# Altium PCB PCB_18_R2.PcbDoc (part 1 of 3)
Units mm, origin at the board's own origin, x right, y up, seen from the top; angles counter-clockwise.
Board outline 255 x 215.3 mm, 2 copper layers (Top Layer, Bottom Layer), stack 1.071 mm thick; 236 components, 0 nets, 1421 pads, 588 vias.
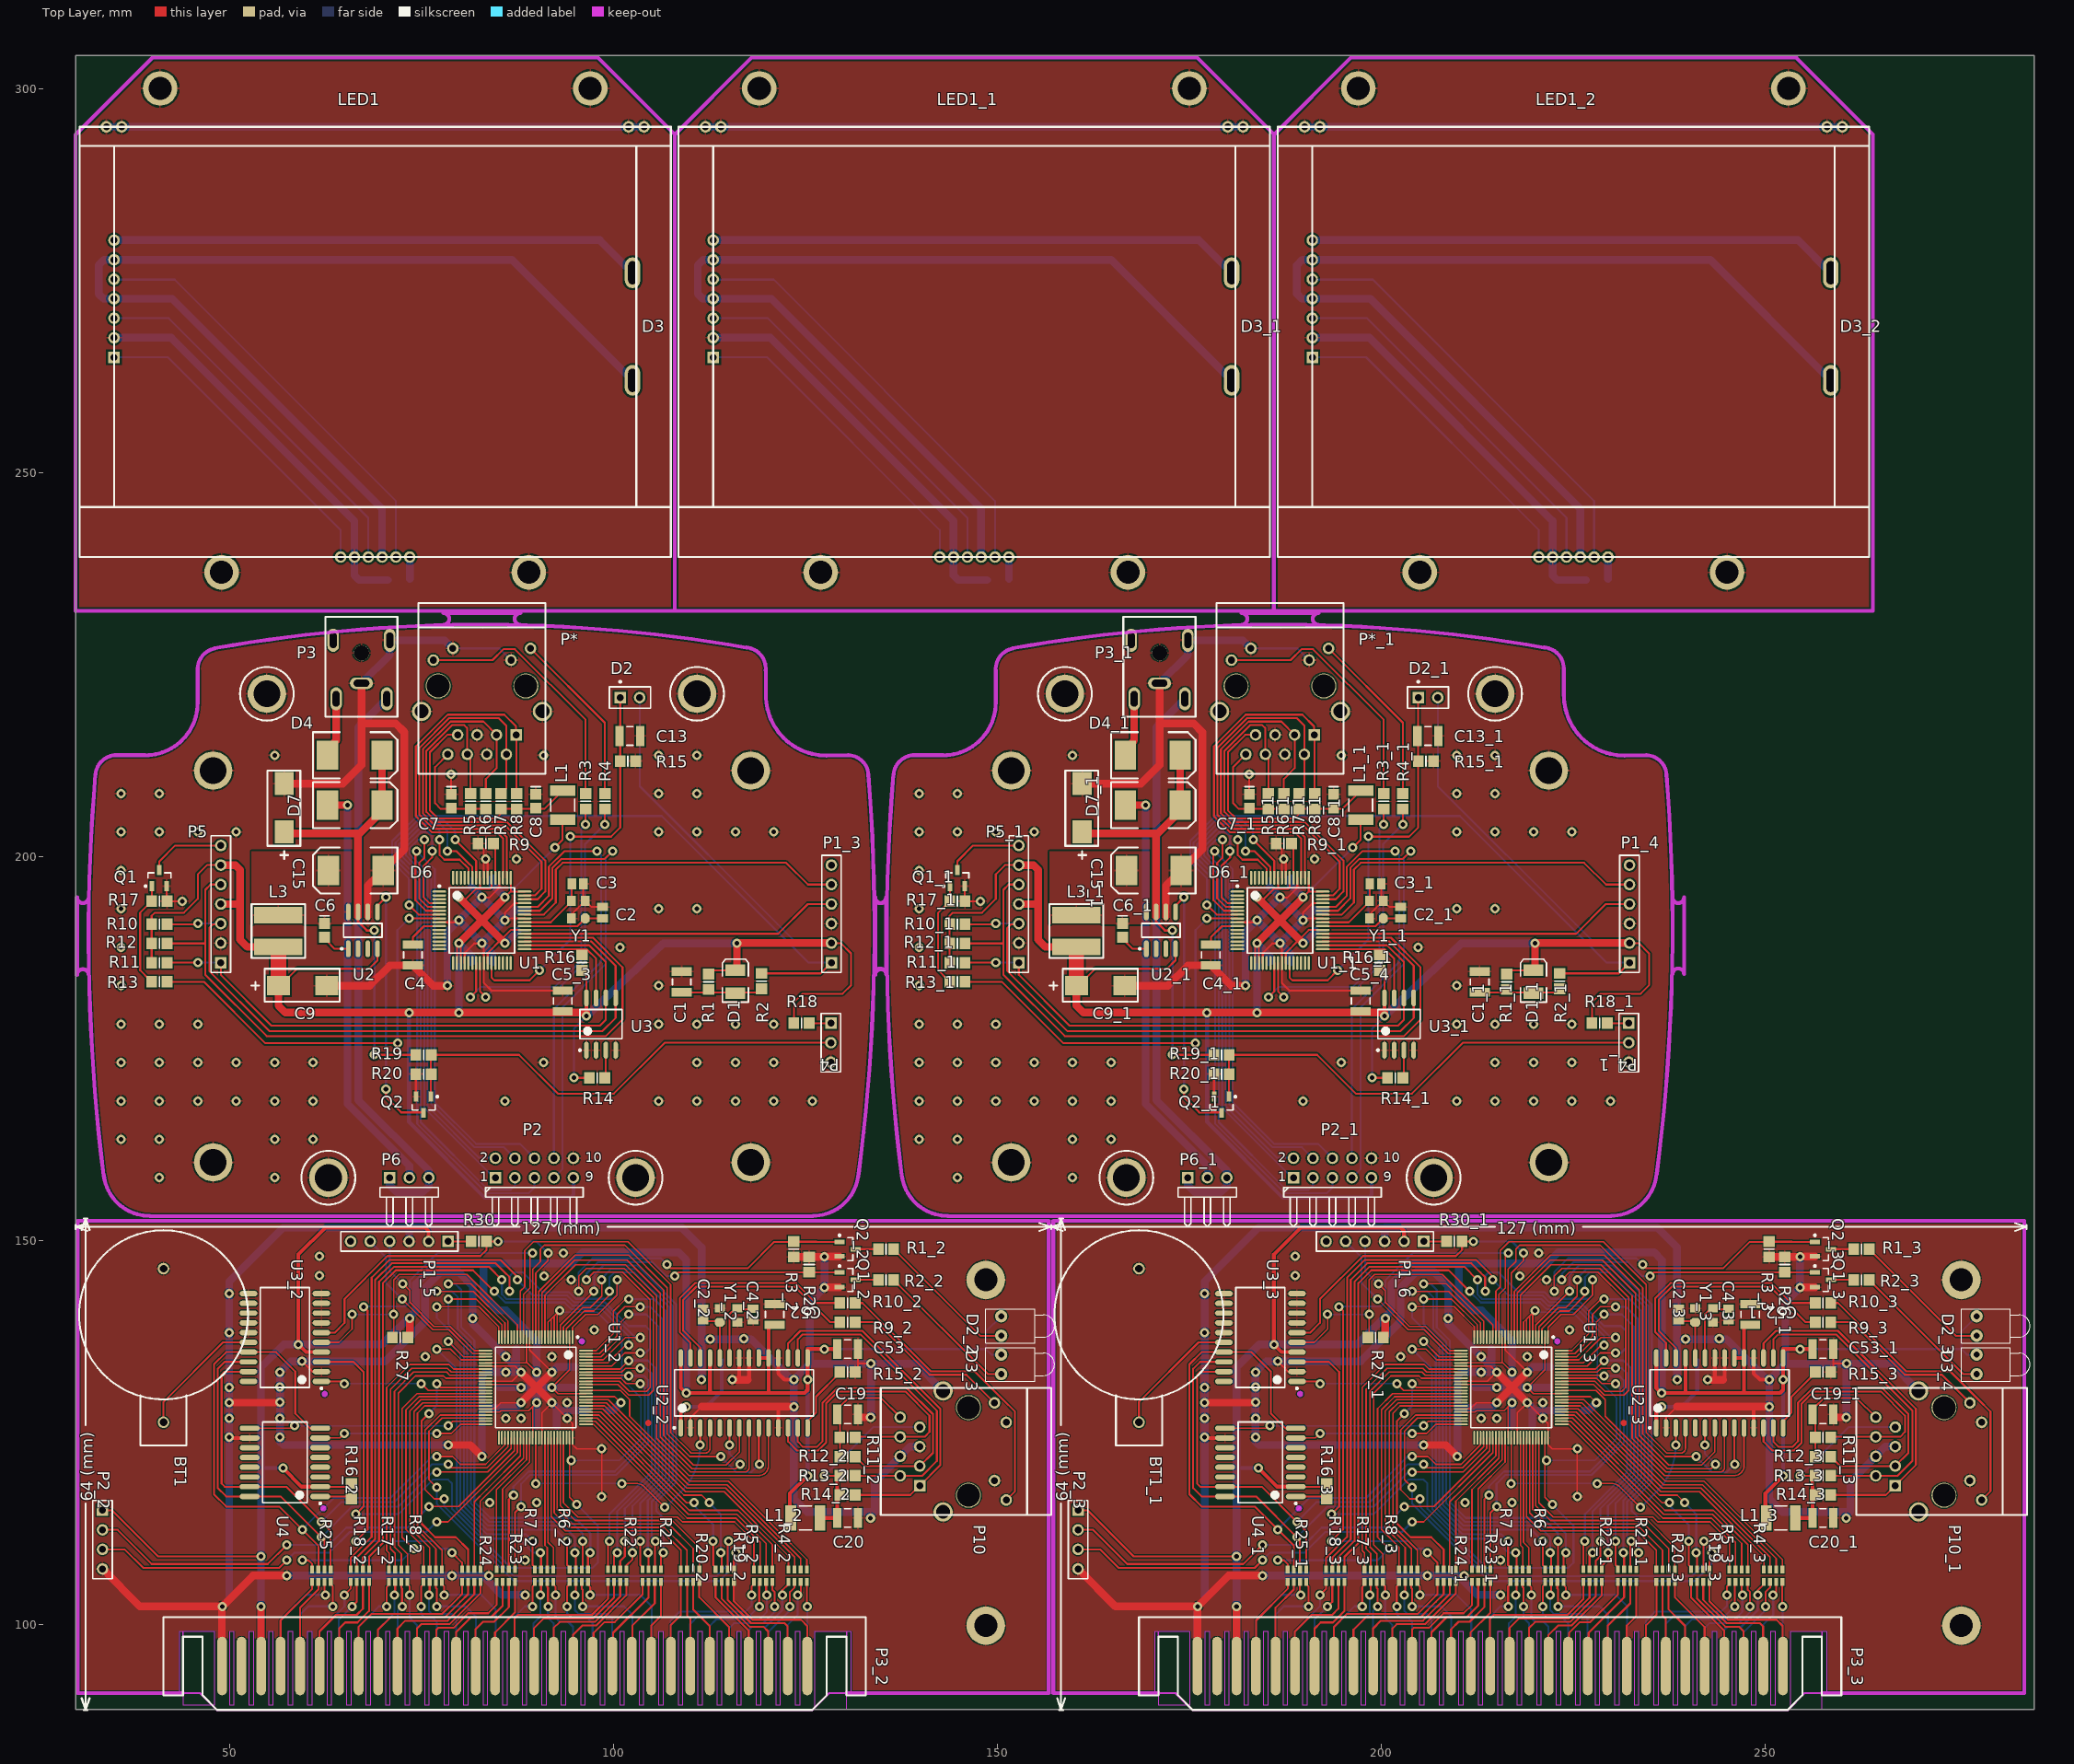
[diagram p0: Top Layer view]
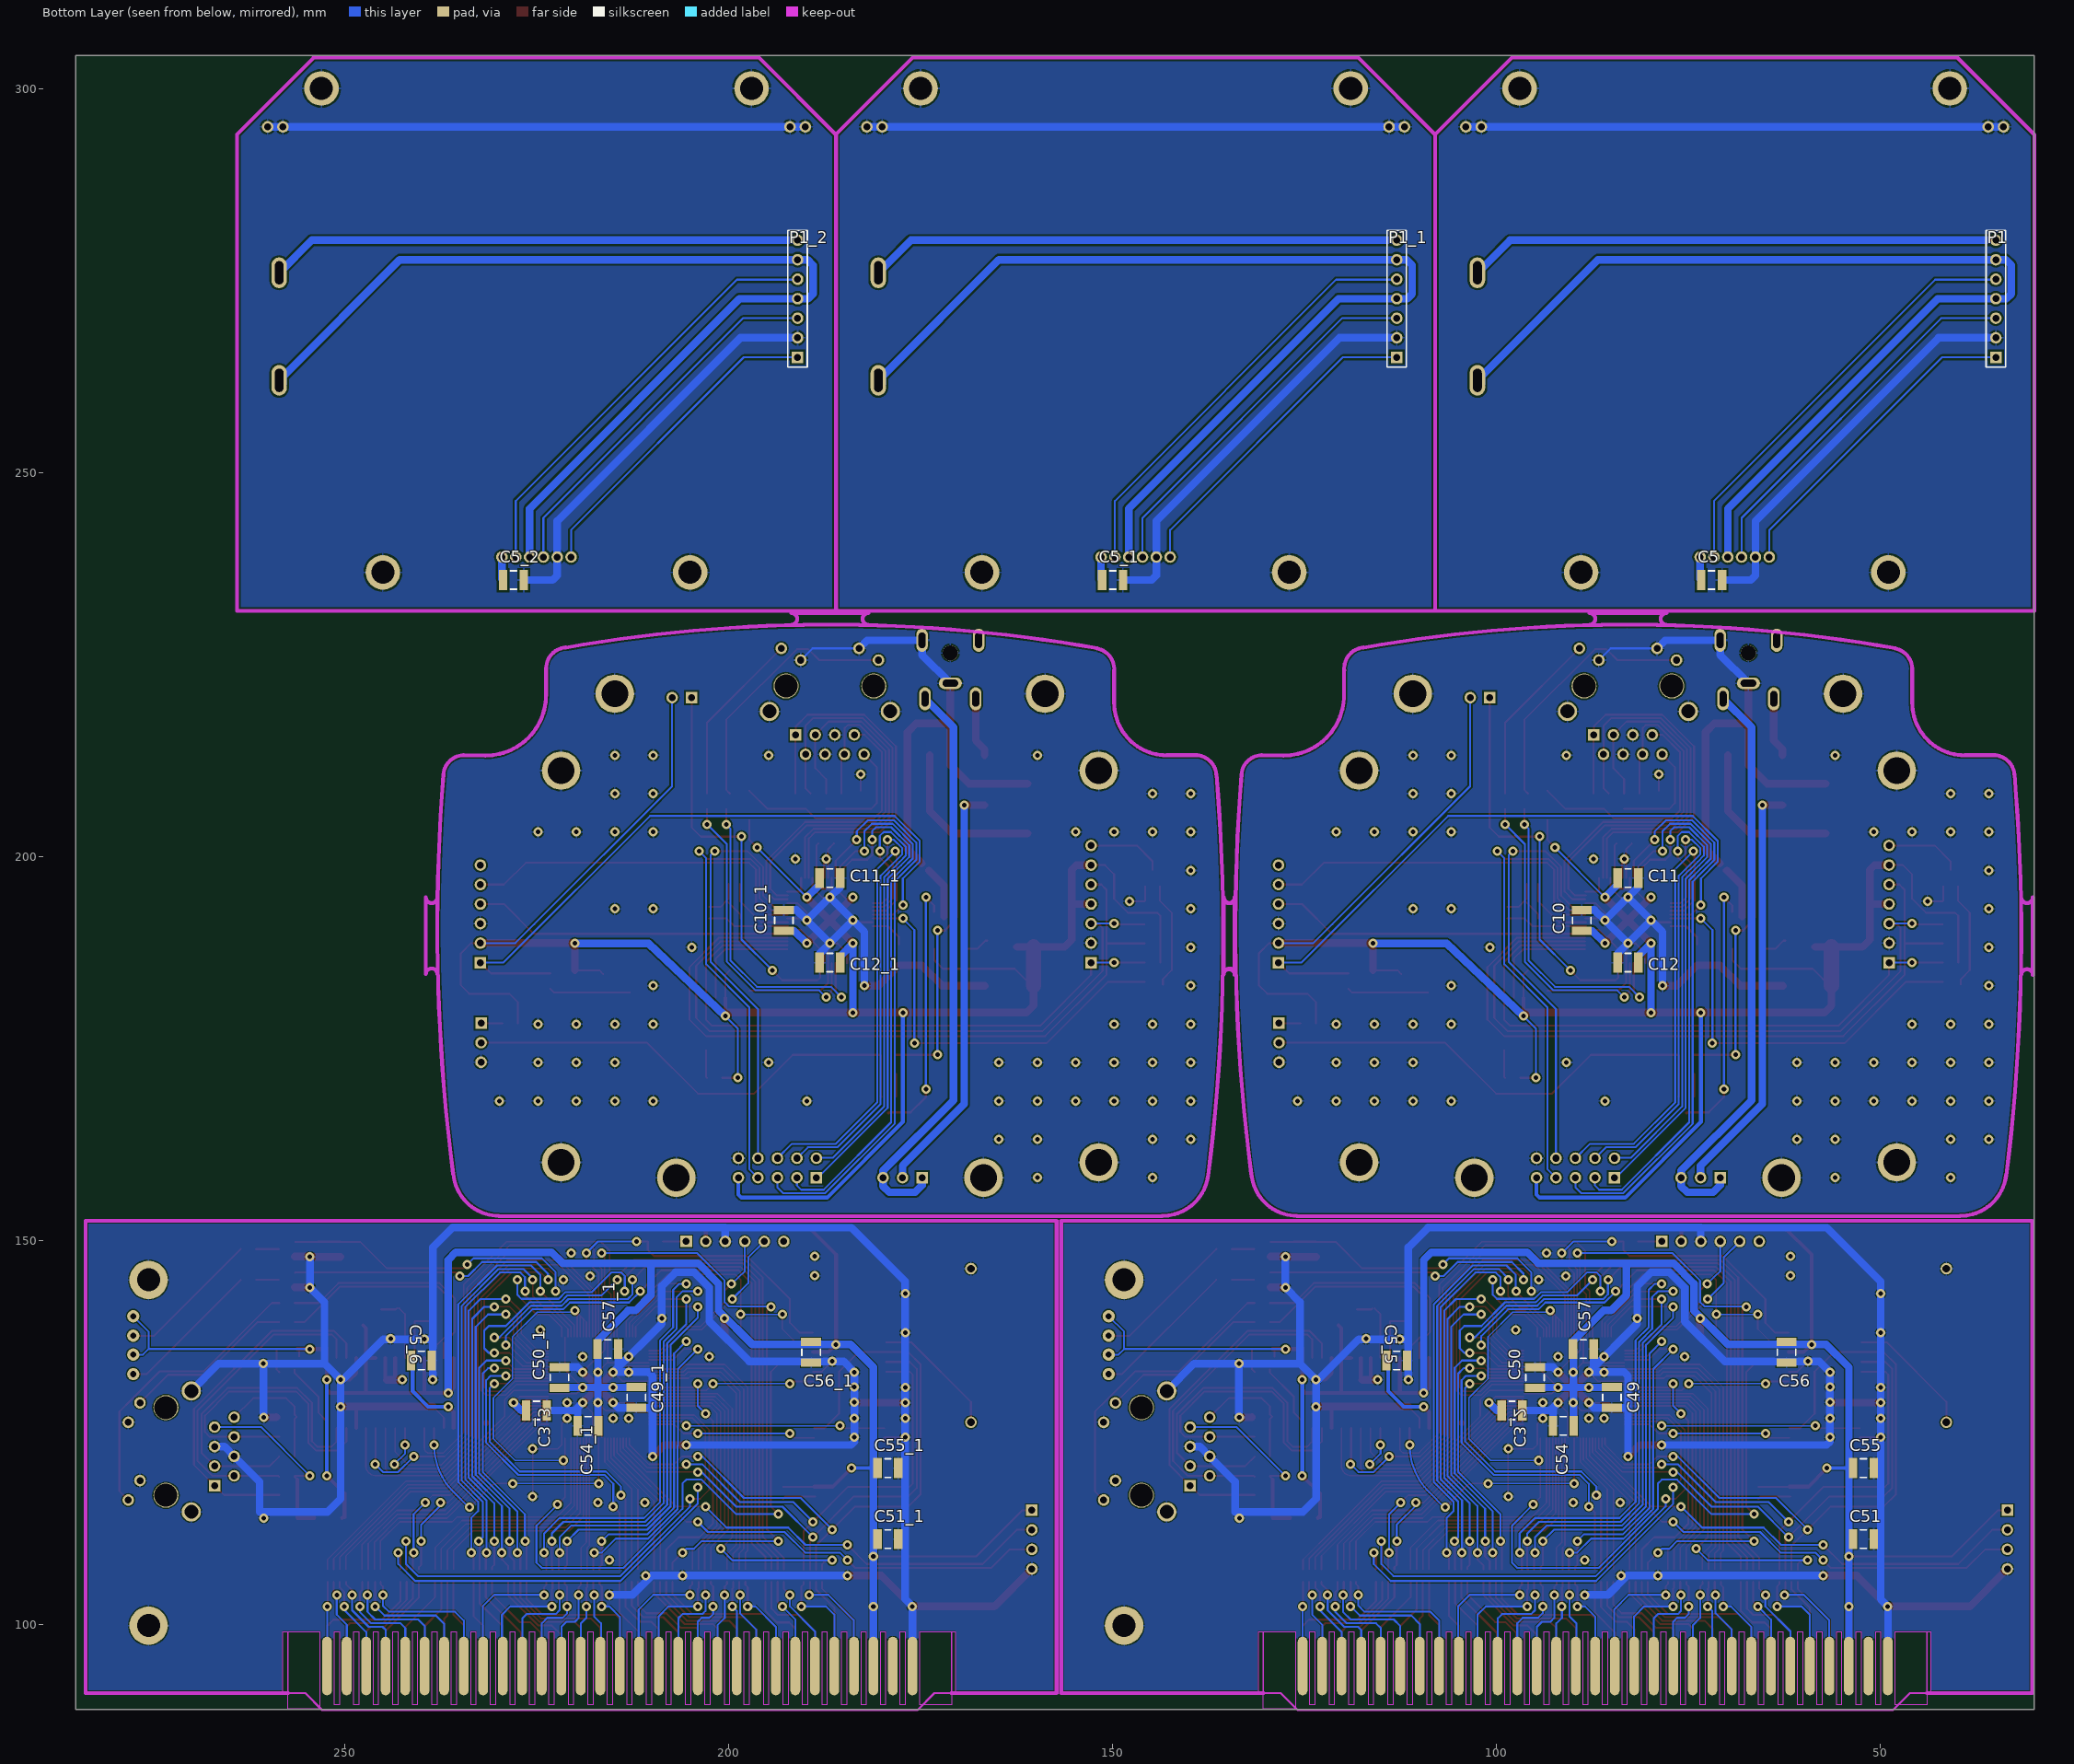
[diagram p1: Bottom Layer view, seen from below]

## Layer stack, top to bottom
Top Layer: signal copper 0.0356
Dielectric: core 1, FR-4, Dk 4.8
Bottom Layer: signal copper 0.0356

## Board outline
30,89 285,89 285,304.3 30,304.3

## Design rules (kind name [scope] priority, off if disabled: settings)
Clearance [All] p1: gap=0.254
PolygonConnect [All] p1: connectstyle=Relief reliefconductorwidth=0.254 reliefentries=4 polygonreliefangle="90 Angle"
RoutingVias [All] p1: holewidth=0.711 width=1.27 viastyle="Through Hole" minholewidth=0.711 minwidth=1.27 maxholewidth=0.711 maxwidth=1.27
SilkscreenOverComponentPads [All] p1: minsilkscreentomaskgap=0.254
SolderMaskExpansion [All] p1: expansion=0.102
Width [All] p1: maxlimit=0.254 minlimit=0.254 preferedwidth=0.254
27 further rules are at their usual default settings.

## Components (designator, comment, footprint, x,y, rotation, side; value= is the part's Value field where it differs from the comment)
BT1 "Battery" "BATTERY PAD" 41.44,140.36 r270 top locked
BT1_1 "Battery" "BATTERY PAD" 168.44,140.36 r270 top locked (schematic designator BT1)
C1 "Cap" CAPC3225L 108.9,183.7 r270 top
C1_1 "Cap" CAPC3225L 212.8,183.7 r270 top (schematic designator C1)
C2 "Cap" CAPC2012L 98.6,192.7 r90 top
C2_1 "Cap" CAPC2012L 202.5,192.7 r90 top (schematic designator C2)
C2_2 "Cap" CAPC2012L 111.7,140.4 r90 top (schematic designator C2)
C2_3 "Cap" CAPC2012L 238.7,140.4 r90 top (schematic designator C2)
C3 "Cap" CAPC2012L 95.35,196.45 r180 top
C3_1 "Cap" CAPC2012L 199.25,196.45 r180 top (schematic designator C3)
C3_2 "Cap" CAPC3225L 98,127.9 r0 bottom locked (schematic designator C3)
C3_3 "Cap" CAPC3225L 225,127.9 r0 bottom locked (schematic designator C3)
C4 "Cap" CAPC3225L 73.9,187.2 r270 top
C4_1 "Cap" CAPC3225L 177.8,187.2 r270 top (schematic designator C4)
C4_2 "Cap" CAPC2012L 118.2,140.4 r90 top (schematic designator C4)
C4_3 "Cap" CAPC2012L 245.2,140.4 r90 top (schematic designator C4)
C5 "Cap" CAPC3225L 72,236 r180 bottom
C5_1 "Cap" CAPC3225L 150,236 r180 bottom (schematic designator C5)
C5_2 "Cap" CAPC3225L 228,236 r180 bottom (schematic designator C5)
C5_3 "Cap" CAPC3225L 93.4,181.2 r90 top (schematic designator C5)
C5_4 "Cap" CAPC3225L 197.3,181.2 r90 top (schematic designator C5)
C5_5 "Cap" CAPC3225L 113,134.4 r180 bottom (schematic designator C5)
C5_6 "Cap" CAPC3225L 240,134.4 r180 bottom (schematic designator C5)
C6 "Cap" CAPC2512L 62.4,190.4 r270 top
C6_1 "Cap" CAPC2512L 166.3,190.4 r270 top (schematic designator C6)
C7 "Cap" CAPC2512L 78.9,207.2 r270 top
C7_1 "Cap" CAPC2512L 182.8,207.2 r270 top (schematic designator C7)
C8 "Cap" CAPC2512L 89.9,207.2 r270 top
C8_1 "Cap" CAPC2512L 193.8,207.2 r270 top (schematic designator C8)
C9 "Cap Pol1" "Type D" 55.9,183.2 r0 top
C9_1 "Cap Pol1" "Type D" 159.8,183.2 r0 top (schematic designator C9)
C10 "Cap" CAPC3225L 88.9,191.7 r90 bottom
C10_1 "Cap" CAPC3225L 192.8,191.7 r90 bottom (schematic designator C10)
C11 "Cap" CAPC3225L 82.9,197.2 r180 bottom
C11_1 "Cap" CAPC3225L 186.8,197.2 r180 bottom (schematic designator C11)
C12 "Cap" CAPC3225L 82.9,186.2 r0 bottom
C12_1 "Cap" CAPC3225L 186.8,186.2 r0 bottom (schematic designator C12)
C13 "Cap" CAPC3225L 102.15,215.7 r0 top
C13_1 "Cap" CAPC3225L 206.05,215.7 r0 top (schematic designator C13)
C15 "Cap Pol1" "Type E" 57.15,202.7 r90 top
C15_1 "Cap Pol1" "Type E" 161.05,202.7 r90 top (schematic designator C15)
C19 "Cap" CAPC3225L 130.5,127.4 r180 top
C19_1 "Cap" CAPC3225L 257.5,127.4 r180 top (schematic designator C19)
C20 "Cap" CAPC3225L 130.5,113.9 r180 top
C20_1 "Cap" CAPC3225L 257.5,113.9 r180 top (schematic designator C20)
C49 "Cap" CAPC3225L 85,129.6 r270 bottom
C49_1 "Cap" CAPC3225L 212,129.6 r270 bottom (schematic designator C49)
C50 "Cap" CAPC3225L 95,132.2 r90 bottom
C50_1 "Cap" CAPC3225L 222,132.2 r90 bottom (schematic designator C50)
C51 "Cap" CAPC3225L 52.25,111.15 r180 bottom
C51_1 "Cap" CAPC3225L 179.25,111.15 r180 bottom (schematic designator C51)
C52 "Cap" CAPC3225L 121,140.4 r90 top
C52_1 "Cap" CAPC3225L 248,140.4 r90 top (schematic designator C52)
C53 "Cap" CAPC3225L 130.5,135.9 r0 top
C53_1 "Cap" CAPC3225L 257.5,135.9 r0 top (schematic designator C53)
C54 "Cap" CAPC3225L 91.3,125.9 r0 bottom
C54_1 "Cap" CAPC3225L 218.3,125.9 r0 bottom (schematic designator C54)
C55 "Cap" CAPC3225L 52.25,120.4 r180 bottom
C55_1 "Cap" CAPC3225L 179.25,120.4 r180 bottom (schematic designator C55)
C56 "Cap" CAPC3225L 62.25,135.495 r270 bottom
C56_1 "Cap" CAPC3225L 189.25,135.495 r270 bottom (schematic designator C56)
C57 "Cap" CAPC3225L 88.7,135.9 r180 bottom
C57_1 "Cap" CAPC3225L 215.7,135.9 r180 bottom (schematic designator C57)
D1 "Diode" DSO-C2/D5.6 115.9,183.7 r90 top
D1_1 "Diode" DSO-C2/D5.6 219.8,183.7 r90 top (schematic designator D1)
D2 "Photo Sen" PIN2 100.9,220.7 r0 top
D2_1 "Photo Sen" PIN2 204.8,220.7 r0 top (schematic designator D2)
D2_2 "LED1" LED-1 150.5,138.9 r0 top (schematic designator D2)
D2_3 "LED1" LED-1 277.5,138.9 r0 top (schematic designator D2)
D3 "TB1065S" TB1065S 103,245.5 r180 top
D3_1 "TB1065S" TB1065S 181,245.5 r180 top (schematic designator D3)
D3_2 "TB1065S" TB1065S 259,245.5 r180 top (schematic designator D3)
D3_3 "LED1" LED-1 150.5,133.9 r0 top (schematic designator D3)
D3_4 "LED1" LED-1 277.5,133.9 r0 top (schematic designator D3)
D4 "Diode" "SMC WBODY" 69.9,213.2 r180 top
D4_1 "Diode" "SMC WBODY" 173.8,213.2 r180 top (schematic designator D4)
D6 "30BQ100" "SMC WBODY" 62.9,198.2 r0 top
D6_1 "30BQ100" "SMC WBODY" 166.8,198.2 r0 top (schematic designator D6)
D7 "Diode" "SMC WBODY" 69.9,206.7 r180 top
D7_1 "Diode" "SMC WBODY" 173.8,206.7 r180 top (schematic designator D7)
L1 "Inductor" INDC4532L 93.4,206.7 r90 top
L1_1 "Inductor" INDC4532L 197.3,206.7 r90 top (schematic designator L1)
L1_2 "Inductor" INDC4532L 125,113.9 r0 top (schematic designator L1)
L1_3 "Inductor" INDC4532L 252,113.9 r0 top (schematic designator L1)
L3 "Inductor" CDRH5D28NP 56.4,192.4 r270 top
L3_1 "Inductor" CDRH5D28NP 160.3,192.4 r270 top (schematic designator L3)
LED1 "TIC218" TIC218 30.5,295 r0 top
LED1_1 "TIC218" TIC218 108.5,295 r0 top (schematic designator LED1)
LED1_2 "TIC218" TIC218 186.5,295 r0 top (schematic designator LED1)
P1 "Header 7" HDR1X7 35,265 r90 bottom
P1_1 "Header 7" HDR1X7 113,265 r90 bottom (schematic designator P1)
P1_2 "Header 7" HDR1X7 191,265 r90 bottom (schematic designator P1)
P1_3 "Программатор" HDR1X6 128.4,186.2 r90 top (schematic designator P1)
P1_4 "Программатор" HDR1X6 232.3,186.2 r90 top (schematic designator P1)
P1_5 "Программатор" HDR1X6 78.5,149.9 r180 top (schematic designator P1)
P1_6 "Программатор" HDR1X6 205.5,149.9 r180 top (schematic designator P1)
P2 "Header 5X2H" HDR2X5H 84.65,158.2 r0 top
P2_1 "Header 5X2H" HDR2X5H 188.55,158.2 r0 top (schematic designator P2)
P2_2 "I2C" HDR1X4 33.5,114.9 r270 top (schematic designator P2)
P2_3 "I2C" HDR1X4 160.5,114.9 r270 top (schematic designator P2)
P3 "PWR coneector" "PWR Con" 70.9,230.7 r270 top
P3_1 "PWR coneector" "PWR Con" 174.8,230.7 r270 top (schematic designator P3)
P3_2 "31x2 Slot" SL-62 49.06,89.56 r0 top (schematic designator P3)
P3_3 "31x2 Slot" SL-62 176.06,89.56 r0 top (schematic designator P3)
P4 "power control" HDR1X3 128.32,178.32 r270 top
P4_1 "power control" HDR1X3 232.22,178.32 r270 top (schematic designator P4)
P5 "Display" HDR1X7 48.9,186.2 r90 top locked
P5_1 "Display" HDR1X7 152.8,186.2 r90 top locked (schematic designator P5)
P6 "Header 3H" HDR1X3H 70.9,158.2 r0 top
P6_1 "Header 3H" HDR1X3H 174.8,158.2 r0 top (schematic designator P6)
P10 "J00-0063NL" ETHERNETCON 146.248,122.568 r0 top
P10_1 "J00-0063NL" ETHERNETCON 273.248,122.568 r0 top (schematic designator P10)
P* "J00-0063NL" EthernetCON 82.9,222.2 r90 top locked
P*_1 "J00-0063NL" EthernetCON 186.8,222.2 r90 top locked (schematic designator P*)
Q1 "BSS123" SOT23_N 40.9,197.2 r90 top
Q1_1 "BSS123" SOT23_N 144.8,197.2 r90 top (schematic designator Q1)
Q1_2 "BSS123" SOT23_N 130.5,144.9 r0 top (schematic designator Q1)
Q1_3 "BSS123" SOT23_N 257.5,144.9 r0 top (schematic designator Q1)
Q2 "BSS123" SOT23_N 75.3,167.7 r270 top
Q2_1 "BSS123" SOT23_N 179.2,167.7 r270 top (schematic designator Q2)
Q2_2 "BSS123" SOT23_N 130.5,148.9 r0 top (schematic designator Q2)
Q2_3 "BSS123" SOT23_N 257.5,148.9 r0 top (schematic designator Q2)
R1 "Res2" RESC2012M 112.4,183.7 r90 top
R1_1 "Res2" RESC2012M 216.3,183.7 r90 top (schematic designator R1)
R1_2 "Res2" RESC2012M 135.5,148.9 r180 top (schematic designator R1)
R1_3 "Res2" RESC2012M 262.5,148.9 r180 top (schematic designator R1)
R2 "Res2" RESC2012M 119.3,183.8 r270 top
R2_1 "Res2" RESC2012M 223.2,183.8 r270 top (schematic designator R2)
R2_2 "Res2" RESC2012M 135.5,144.9 r180 top (schematic designator R2)
R2_3 "Res2" RESC2012M 262.5,144.9 r180 top (schematic designator R2)
R3 "Res2" RESC2012M 96.4,207.2 r90 top
R3_1 "Res2" RESC2012M 200.3,207.2 r90 top (schematic designator R3)
R3_2 "Res2" RESC2012M 123.5,148.9 r270 top (schematic designator R3)
R3_3 "Res2" RESC2012M 250.5,148.9 r270 top (schematic designator R3)
R4 "Res2" RESC2012M 98.9,207.2 r90 top
R4_1 "Res2" RESC2012M 202.8,207.2 r90 top (schematic designator R4)
R4_2 "CAT16" CAT16 124,106.4 r180 top (schematic designator R4)
R4_3 "CAT16" CAT16 251,106.4 r180 top (schematic designator R4)
R5 "Res2" RESC2012M 81.4,207.2 r90 top
R5_1 "Res2" RESC2012M 185.3,207.2 r90 top (schematic designator R5)
R5_2 "CAT16" CAT16 119.5,106.4 r180 top (schematic designator R5)
R5_3 "CAT16" CAT16 246.5,106.4 r180 top (schematic designator R5)
R6 "Res2" RESC2012M 83.4,207.2 r90 top
R6_1 "Res2" RESC2012M 187.3,207.2 r90 top (schematic designator R6)
R6_2 "CAT16" CAT16 95.5,106.4 r180 top (schematic designator R6)
R6_3 "CAT16" CAT16 222.5,106.4 r180 top (schematic designator R6)
R7 "Res2" RESC2012M 85.4,207.2 r90 top
R7_1 "Res2" RESC2012M 189.3,207.2 r90 top (schematic designator R7)
R7_2 "CAT16" CAT16 91,106.4 r180 top (schematic designator R7)
R7_3 "CAT16" CAT16 218,106.4 r180 top (schematic designator R7)
R8 "Res2" RESC2012M 87.4,207.2 r90 top
R8_1 "Res2" RESC2012M 191.3,207.2 r90 top (schematic designator R8)
R8_2 "CAT16" CAT16 76.5,106.4 r180 top (schematic designator R8)
R8_3 "CAT16" CAT16 203.5,106.4 r180 top (schematic designator R8)
R9 "Res2" RESC2012M 83.4,201.7 r0 top
R9_1 "Res2" RESC2012M 187.3,201.7 r0 top (schematic designator R9)
R9_2 "Res2" RESC2012M 130.5,139.4 r0 top (schematic designator R9)
R9_3 "Res2" RESC2012M 257.5,139.4 r0 top (schematic designator R9)
R10 "Res2" RESC2012M 40.9,191.2 r0 top
R10_1 "Res2" RESC2012M 144.8,191.2 r0 top (schematic designator R10)
R10_2 "Res2" RESC2012M 130.5,141.9 r0 top (schematic designator R10)
R10_3 "Res2" RESC2012M 257.5,141.9 r0 top (schematic designator R10)
R11 "Res2" RESC2012M 40.9,186.2 r0 top
R11_1 "Res2" RESC2012M 144.8,186.2 r0 top (schematic designator R11)
R11_2 "Res2" RESC2012M 130.5,124.4 r0 top (schematic designator R11)
R11_3 "Res2" RESC2012M 257.5,124.4 r0 top (schematic designator R11)
R12 "Res2" RESC2012M 40.9,188.7 r180 top
R12_1 "Res2" RESC2012M 144.8,188.7 r180 top (schematic designator R12)
R12_2 "Res2" RESC2012M 130.5,121.9 r0 top (schematic designator R12)
R12_3 "Res2" RESC2012M 257.5,121.9 r0 top (schematic designator R12)
R13 "Res2" RESC2012M 40.9,183.7 r180 top
R13_1 "Res2" RESC2012M 144.8,183.7 r180 top (schematic designator R13)
R13_2 "Res2" RESC2012M 130.5,119.4 r0 top (schematic designator R13)
R13_3 "Res2" RESC2012M 257.5,119.4 r0 top (schematic designator R13)
R14 "Res2" RESC2012M 97.9,171.2 r0 top
R14_1 "Res2" RESC2012M 201.8,171.2 r0 top (schematic designator R14)
R14_2 "Res2" RESC2012M 130.5,116.9 r0 top (schematic designator R14)
R14_3 "Res2" RESC2012M 257.5,116.9 r0 top (schematic designator R14)
R15 "Res2" RESC2012M 101.9,212.45 r180 top
R15_1 "Res2" RESC2012M 205.8,212.45 r180 top (schematic designator R15)
R15_2 "Res2" RESC2012M 130.5,132.9 r180 top (schematic designator R15)
R15_3 "Res2" RESC2012M 257.5,132.9 r180 top (schematic designator R15)
R16 "Res2" RESC2012M 95.9,186.2 r90 top
R16_1 "Res2" RESC2012M 199.8,186.2 r90 top (schematic designator R16)
R16_2 "Res2" RESC2012M 65.9,117.4 r90 top (schematic designator R16)
R16_3 "Res2" RESC2012M 192.9,117.4 r90 top (schematic designator R16)
R17 "Res2" RESC2012M 40.9,194.2 r0 top
R17_1 "Res2" RESC2012M 144.8,194.2 r0 top (schematic designator R17)
R17_2 "CAT16" CAT16 72,106.4 r180 top locked (schematic designator R17)
R17_3 "CAT16" CAT16 199,106.4 r180 top locked (schematic designator R17)
R18 "Res2" RESC2012M 124.51,178.32 r0 top
R18_1 "Res2" RESC2012M 228.41,178.32 r0 top (schematic designator R18)
R18_2 "CAT16" CAT16 67,106.4 r0 top locked (schematic designator R18)
R18_3 "CAT16" CAT16 194,106.4 r0 top locked (schematic designator R18)
R19 "Res2" RESC2012M 75.3,174.2 r0 top
R19_1 "Res2" RESC2012M 179.2,174.2 r0 top (schematic designator R19)
R19_2 "CAT16" CAT16 114.5,106.4 r0 top (schematic designator R19)
R19_3 "CAT16" CAT16 241.5,106.4 r0 top (schematic designator R19)
R20 "Res2" RESC2012M 75.3,171.7 r180 top
R20_1 "Res2" RESC2012M 179.2,171.7 r180 top (schematic designator R20)
R20_2 "CAT16" CAT16 110,106.4 r0 top (schematic designator R20)
R20_3 "CAT16" CAT16 237,106.4 r0 top (schematic designator R20)
R21 "CAT16" CAT16 105,106.4 r0 top
R21_1 "CAT16" CAT16 232,106.4 r0 top (schematic designator R21)
R22 "CAT16" CAT16 100.5,106.4 r0 top
R22_1 "CAT16" CAT16 227.5,106.4 r0 top (schematic designator R22)
R23 "CAT16" CAT16 86,106.4 r0 top
R23_1 "CAT16" CAT16 213,106.4 r0 top (schematic designator R23)
R24 "CAT16" CAT16 81.5,106.4 r0 top
R24_1 "CAT16" CAT16 208.5,106.4 r0 top (schematic designator R24)
R25 "CAT16" CAT16 62,106.4 r180 top
R25_1 "CAT16" CAT16 189,106.4 r180 top (schematic designator R25)
R26 "Res2" RESC2012M 125.5,146.9 r90 top
R26_1 "Res2" RESC2012M 252.5,146.9 r90 top (schematic designator R26)
R27 "Res2" RESC2012M 72.25,137.4 r0 top
R27_1 "Res2" RESC2012M 199.25,137.4 r0 top (schematic designator R27)
R30 "Res2" RESC2012M 82.5,149.9 r0 top
R30_1 "Res2" RESC2012M 209.5,149.9 r0 top (schematic designator R30)
U1 "PIC18F66J60-I/PT" TQFP-PT64_N 82.9,191.7 r0 top locked
U1_1 "PIC18F66J60-I/PT" TQFP-PT64_N 186.8,191.7 r0 top locked (schematic designator U1)
U1_2 "DSPIC33FJ256MC710T-I/PF" TQFP-PT100_N 89.9,130.9 r270 top locked (schematic designator U1)
U1_3 "DSPIC33FJ256MC710T-I/PF" TQFP-PT100_N 216.9,130.9 r270 top locked (schematic designator U1)
U2 "LM2674M-3.3" M08A_N 67.4,190.4 r90 top
U2_1 "LM2674M-3.3" M08A_N 171.3,190.4 r90 top (schematic designator U2)
U2_2 "ENC28J60-I/SO" SOIC-SO28_N 117.038,130.188 r90 top (schematic designator U2)
U2_3 "ENC28J60-I/SO" SOIC-SO28_N 244.038,130.188 r90 top (schematic designator U2)
U3 "24FC1025T-I/SM" SOIJ-SM8_N 98.4,178.2 r90 top
U3_1 "24FC1025T-I/SM" SOIJ-SM8_N 202.3,178.2 r90 top (schematic designator U3)
U3_2 "DS3234" SOIC20_M 57.25,137.4 r180 top locked (schematic designator U3)
U3_3 "DS3234" SOIC20_M 184.25,137.4 r180 top locked (schematic designator U3)
U4 "M25P128" SOIC127P1030-16M 57.25,121.15 r180 top locked
U4_1 "M25P128" SOIC127P1030-16M 184.25,121.15 r180 top locked (schematic designator U4)
Y1 "Кварцевый резонатор" "HC 49SM" 96.35,191.95 r90 top
Y1_1 "Кварцевый резонатор" "HC 49SM" 200.25,191.95 r90 top (schematic designator Y1)
Y1_2 "Кварцевый резонатор" "HC 49SM" 113.863,139.388 r0 top (schematic designator Y1)
Y1_3 "Кварцевый резонатор" "HC 49SM" 240.863,139.388 r0 top (schematic designator Y1)

## Footprints (in the part's own frame and the unit in brackets; to place one, negate y for a bottom-side part, rotate by r counter-clockwise, add the part's x,y. Pads: shape width x height; smd on the part's side, far side on the other; paste and mask are expansions set on the pad)
"BATTERY PAD" [mm]
  round 1.5 hole 1: 1(14,0) 2(-6,0)
  silkscreen extent -11,-11 17,11, body extent -10.91,-10.98 17,10.98, height 6
CAPC2012L [mm] "Chip Capacitor, Body 2.0x1.3mm, IPC High Density"
  rect 1.1x1.4 smd: 1(-0.75,0) 2(0.75,0)
  body extent -1.1,-0.72 1.1,0.72, height 1.4
CAPC2512L [mm] "Chip Capacitor, Body 2.54x1.27mm, IPC High Density"
  rect 1.4x1.4 smd: 1(-0.9,0) 2(0.9,0)
  silkscreen extent -1.9,-0.6 -1.9,0.6, body extent -1.45,-0.82 1.45,0.82, height 1.3
CAPC3225L [mm] "Chip Capacitor, Body 3.2x2.5mm, IPC High Density"
  rect 1.1x2.6 smd: 1(-1.35,0) 2(1.35,0)
  silkscreen extent -0.4,-1.2 0.4,1.2, body extent -1.7,-1.35 1.7,1.35, height 1.5
CAT16 [mm]
  rect 0.5x1 smd: 1(-1.2,-0.8) 2(-0.4,-0.8) 3(0.4,-0.8) 4(1.2,-0.8) 5(1.2,0.825) 6(0.4,0.825) 7(-0.4,0.825) 8(-1.2,0.825)
  body extent -1.75,-0.8 1.75,0.75, height 0.5
CDRH5D28NP [mm] "POWER INDUCTORS <SMD Type: CDRH Series>"
  rect 2.15x6.3 smd: 1(0,0) 2(4.15,0)
  silkscreen extent -1.4,-3.5 5.6,3.5, body extent -0.82,-2.9 4.97,2.91, height 3
DSO-C2/D5.6 [mm] "SM LED; 2 C-Bend Leads; Body 3.5 x 2.8 x 1.9 mm, inc leads (LxWxH typ)"
  rect 1.5x2.6 smd: 1(-1.5,0) 2(1.5,0)
  silkscreen extent -2.65,-1.7 2.95,1.7
ETHERNETCON [mm] "Ethernet connector w/two LEDs"
  rect 1.5x1.5 hole 0.9: 1(-6.35,-4.445)
  round 1.5 hole 0.9: 2(-8.89,-3.175) 3(-6.35,-1.905) 4(-8.89,-0.635) 5(-6.35,0.635) 6(-8.89,1.905) 7(-6.35,3.175) 8(-8.89,4.445) 9(4.902,-6.325) 10(3.378,-3.785) 11(4.902,3.785) 12(3.378,6.325)
  round 2.5 hole 1.8: 13(-3.302,-7.874) 14(-3.302,7.874)
  round 3.25 hole 3 unplated: 15(0,-5.715) 16(0,5.715)
  silkscreen extent -11.43,-8.25 10.79,8.25, body extent -11.43,-8.25 11,8.25, height 13.97
EthernetCON [mm] "Ethernet connector w/two LEDs"
  rect 1.5x1.5 hole 0.9: 1(-6.35,-4.445)
  round 1.5 hole 0.9: 2(-8.89,-3.175) 3(-6.35,-1.905) 4(-8.89,-0.635) 5(-6.35,0.635) 6(-8.89,1.905) 7(-6.35,3.175) 8(-8.89,4.445) 9(4.902,-6.325) 10(3.378,-3.785) 11(4.902,3.785) 12(3.378,6.325)
  round 2.5 hole 1.8: 13(-3.302,-7.874) 14(-3.302,7.874)
  round 3.25 hole 3 unplated: 15(0,-5.715) 16(0,5.715)
  silkscreen extent -11.43,-8.25 10.79,8.25, body extent -11.43,-8.25 11,8.25, height 13.97
"HC 49SM" [mm] "Кварцевый резонатор"
  oct 1.3x1.1 smd: 1(0,0)
  rect 1.3x1.1 smd: 2(2.3,0) 3(2.3,1.8) 4(0,1.8)
  body extent -0.45,-0.38 2.75,2.12, height 1.2
HDR1X3 [mm] "Connector; Header; 3 Position"
  rect 1.5x1.5 hole 0.9: 1(0,0)
  round 1.5 hole 0.9: 2(2.54,0) 3(5.08,0)
  silkscreen extent -1.27,-1.27 6.35,1.27
HDR1X3H [mm] "Connector; Header; 3 Position; Right Angle"
  rect 1.5x1.5 hole 0.9: 1(0,0)
  round 1.5 hole 0.9: 2(2.54,0) 3(5.08,0)
  silkscreen extent -1.27,-6.35 6.35,-1.27
HDR1X4 [mm] "Connector; Header; 4 Position"
  rect 1.5x1.5 hole 0.9: 1(0,0)
  round 1.5 hole 0.9: 2(2.54,0) 3(5.08,0) 4(7.62,0)
  silkscreen extent -1.27,-1.27 8.89,1.27
HDR1X6 [mm] "Connector; Header; 6 Position"
  rect 1.5x1.5 hole 0.9: 1(0,0)
  round 1.5 hole 0.9: 2(2.54,0) 3(5.08,0) 4(7.62,0) 5(10.16,0) 6(12.7,0)
  silkscreen extent -1.27,-1.27 13.97,1.27
HDR1X7 [mm] "Connector; Header; 7 Position"
  rect 1.5x1.5 hole 0.9: 1(0,0)
  round 1.5 hole 0.9: 2(2.54,0) 3(5.08,0) 4(7.62,0) 5(10.16,0) 6(12.7,0) 7(15.24,0)
  silkscreen extent -1.27,-1.27 16.51,1.27
HDR2X5H [mm] "Connector; Header; 5x2 Position; Right Angle"
  rect 1.5x1.5 hole 0.9: 1(0,0)
  round 1.5 hole 0.9: 2(0,2.54) 3(2.54,0) 4(2.54,2.54) 5(5.08,0) 6(5.08,2.54) 7(7.62,0) 8(7.62,2.54) 9(10.16,0) 10(10.16,2.54)
  silkscreen extent -1.27,-6.35 11.43,-1.27
INDC4532L [mm] "Chip Inductor, Body 4.5x3.2mm, IPC High Density"
  rect 1.4x3.3 smd: 1(-1.9,0) 2(1.9,0)
  silkscreen extent -0.8,-1.55 0.8,1.55, body extent -2.4,-1.7 2.4,1.7, height 0.55
LED-1 [mm] "Typical RED GaAs LED; 2 Leads"
  round 1.6 hole 0.8: 1(0,1.27) 2(0,-1.27)
  silkscreen extent -2,-2.2 6.95,2.2
M08A_N [mm] "SOIC, 8-Leads, Body 4.9x3.9mm, Pitch 1.27mm, IPC Medium Density"
  oval 2.2x0.6 smd: 1(-2.4,1.905) 2(-2.4,0.635) 3(-2.4,-0.635) 4(-2.4,-1.905) 5(2.4,-1.905) 6(2.4,-0.635) 7(2.4,0.635) 8(2.4,1.905)
  silkscreen extent -2.52,-2.5 0.9,2.88, body extent -2,-2.5 2,2.5, height 1.75
PIN2 [mm] "Photosensitive Diode; 2 Leads"
  rect 1.5x1.5 hole 0.9: 1(0,0)
  round 1.5 hole 0.9: 2(2.54,0)
  silkscreen extent -1.4,-1.4 3.94,2.17
"PWR Con" [mm] "Connector"
  oval 1.5x3 hole 0.9 slot 2 at 90 deg: 1(8.128,-3.683)
  oval 3x1.5 hole 0.9 slot 2 at 0 deg: 2(10.16,-0.381) 3(10.16,-6.985) 4_1(2.54,-7.366) 5(2.54,0)
  round 2 hole 2: 4(4.191,-3.683)
  silkscreen extent -0.5,-8.4 12.5,1, body extent 0,-7.37 12,0, height 10
RESC2012M [mm] "Chip Resistor, Body 2.0x1.2mm, IPC Low Density"
  rect 1.4x1.5 smd: 1(-1,0) 2(1,0)
  silkscreen extent 0,-0.65 0,0.65, body extent -1.07,-0.7 1.07,0.7, height 0.7
SL-62 [mm]
  oval 1.27x7.62 smd: 1(0,5.08) 2(2.54,5.08) 3(5.08,5.08) 4(7.62,5.08) 5(10.16,5.08) 6(12.7,5.08) 7(15.24,5.08) 8(17.78,5.08) 9(20.32,5.08) 10(22.86,5.08) 11(25.4,5.08) 12(27.94,5.08) 13(30.48,5.08) 14(33.02,5.08) 15(35.56,5.08) 16(38.1,5.08) 17(40.64,5.08) 18(43.18,5.08) 19(45.72,5.08) 20(48.26,5.08) 21(50.8,5.08) 22(53.34,5.08) 23(55.88,5.08) 24(58.42,5.08) 25(60.96,5.08) 26(63.5,5.08) 27(66.04,5.08) 28(68.58,5.08) 29(71.12,5.08) 30(73.66,5.08) 31(76.2,5.08)
  oval 1.27x7.62 smd far side: 32(0,5.08) 33(2.54,5.08) 34(5.08,5.08) 35(7.62,5.08) 36(10.16,5.08) 37(12.7,5.08) 38(15.24,5.08) 39(17.78,5.08) 40(20.32,5.08) 41(22.86,5.08) 42(25.4,5.08) 43(27.94,5.08) 44(30.48,5.08) 45(33.02,5.08) 46(35.56,5.08) 47(38.1,5.08) 48(40.64,5.08) 49(43.18,5.08) 50(45.72,5.08) 51(48.26,5.08) 52(50.8,5.08) 53(53.34,5.08) 54(55.88,5.08) 55(58.42,5.08) 56(60.96,5.08) 57(63.5,5.08) 58(66.04,5.08) 59(68.58,5.08) 60(71.12,5.08) 61(73.66,5.08) 62(76.2,5.08)
  Keep-Out Layer region: 74.613,0 75.248,0 75.248,9.525 74.613,9.525
  Keep-Out Layer region: 72.073,0 72.708,0 72.708,9.525 72.073,9.525
  Keep-Out Layer region: 69.533,0 70.168,0 70.168,9.525 69.533,9.525
  Keep-Out Layer region: 66.993,0 67.628,0 67.628,9.525 66.993,9.525
  Keep-Out Layer region: 64.453,0 65.088,0 65.088,9.525 64.453,9.525
  Keep-Out Layer region: 61.913,0 62.548,0 62.548,9.525 61.913,9.525
  Keep-Out Layer region: 59.373,0 60.008,0 60.008,9.525 59.373,9.525
  Keep-Out Layer region: 56.833,0 57.468,0 57.468,9.525 56.833,9.525
  Keep-Out Layer region: 54.293,0 54.928,0 54.928,9.525 54.293,9.525
  Keep-Out Layer region: 51.753,0 52.388,0 52.388,9.525 51.753,9.525
  Keep-Out Layer region: 49.213,0 49.848,0 49.848,9.525 49.213,9.525
  Keep-Out Layer region: 46.673,0 47.308,0 47.308,9.525 46.673,9.525
  Keep-Out Layer region: 44.133,0 44.768,0 44.768,9.525 44.133,9.525
  Keep-Out Layer region: 41.593,0 42.228,0 42.228,9.525 41.593,9.525
  Keep-Out Layer region: 39.053,0 39.688,0 39.688,9.525 39.053,9.525
  Keep-Out Layer region: 36.513,0 37.148,0 37.148,9.525 36.513,9.525
  Keep-Out Layer region: 33.973,0 34.608,0 34.608,9.525 33.973,9.525
  Keep-Out Layer region: 31.433,0 32.068,0 32.068,9.525 31.433,9.525
  Keep-Out Layer region: 28.893,0 29.528,0 29.528,9.525 28.893,9.525
  Keep-Out Layer region: 26.353,0 26.988,0 26.988,9.525 26.353,9.525
  Keep-Out Layer region: 23.813,0 24.448,0 24.448,9.525 23.813,9.525
  Keep-Out Layer region: 21.273,0 21.908,0 21.908,9.525 21.273,9.525
  Keep-Out Layer region: 18.733,0 19.368,0 19.368,9.525 18.733,9.525
  Keep-Out Layer region: 16.193,0 16.828,0 16.828,9.525 16.193,9.525
  Keep-Out Layer region: 13.653,0 14.288,0 14.288,9.525 13.653,9.525
  Keep-Out Layer region: 11.113,0 11.748,0 11.748,9.525 11.113,9.525
  Keep-Out Layer region: 8.573,0 9.208,0 9.208,9.525 8.573,9.525
  Keep-Out Layer region: 6.033,0 6.668,0 6.668,9.525 6.033,9.525
  Keep-Out Layer region: 3.493,0 4.128,0 4.128,9.525 3.493,9.525
  Keep-Out Layer region: 0.953,0 1.588,0 1.588,9.525 0.953,9.525
  Keep-Out Layer region: -5.08,0 -0.952,0 -0.952,9.525 -5.08,9.525
  Keep-Out Layer region: 77.153,-0.5 81.3,-0.5 81.3,9.525 77.153,9.525
  silkscreen extent -7.62,-0.64 83.82,11.43
"SMC WBODY" [mil]
  rect 110x150 smd: 1(280.51,0) 2(0,0)
  silkscreen extent -79,-118 354,118, body extent 0,-118 276,118, height 84
SOIC20_M [mm] "SOIC, 20-Leads, Body 12.8x7.5mm, Pitch 1.27mm, IPC Low Density"
  oval 2.3x0.7 smd: 1(-4.75,5.715) 2(-4.75,4.445) 3(-4.75,3.175) 4(-4.75,1.905) 5(-4.75,0.635) 6(-4.75,-0.635) 7(-4.75,-1.905) 8(-4.75,-3.175) 9(-4.75,-4.445) 10(-4.75,-5.715) 11(4.75,-5.715) 12(4.75,-4.445) 13(4.75,-3.175) 14(4.75,-1.905) 15(4.75,-0.635) 16(4.75,0.635) 17(4.75,1.905) 18(4.75,3.175) 19(4.75,4.445) 20(4.75,5.715)
  silkscreen extent -4.87,-6.5 3.2,6.74, body extent -3.8,-6.5 3.8,6.5, height 2.67
SOIC127P1030-16M [mm] "SOIC, 16-Leads, Body 10.3x7.5mm, Pitch 1.27mm, IPC Low Density"
  oval 2.6x0.7 smd: 1(-4.6,4.445) 2(-4.6,3.175) 3(-4.6,1.905) 4(-4.6,0.635) 5(-4.6,-0.635) 6(-4.6,-1.905) 7(-4.6,-3.175) 8(-4.6,-4.445) 9(4.6,-4.445) 10(4.6,-3.175) 11(4.6,-1.905) 12(4.6,-0.635) 13(4.6,0.635) 14(4.6,1.905) 15(4.6,3.175) 16(4.6,4.445)
  silkscreen extent -4.72,-5.25 2.9,5.47, body extent -3.75,-5.25 3.75,5.25, height 2.65
SOIC-SO28_N [mm] "SOIC, 28-Leads, Body 17.9x7.5mm, Pitch 1.27mm, IPC Medium Density"
  oval 2.3x0.6 smd: 1(-4.55,8.255) 2(-4.55,6.985) 3(-4.55,5.715) 4(-4.55,4.445) 5(-4.55,3.175) 6(-4.55,1.905) 7(-4.55,0.635) 8(-4.55,-0.635) 9(-4.55,-1.905) 10(-4.55,-3.175) 11(-4.55,-4.445) 12(-4.55,-5.715) 13(-4.55,-6.985) 14(-4.55,-8.255) 15(4.55,-8.255) 16(4.55,-6.985) 17(4.55,-5.715) 18(4.55,-4.445) 19(4.55,-3.175) 20(4.55,-1.905) 21(4.55,-0.635) 22(4.55,0.635) 23(4.55,1.905) 24(4.55,3.175) 25(4.55,4.445) 26(4.55,5.715) 27(4.55,6.985) 28(4.55,8.255)
  silkscreen extent -4.67,-9.05 3,9.23, body extent -3.8,-9.06 3.8,9.06, height 2.65
SOIJ-SM8_N [mm] "SOP, 8-Leads, Body 5.2x5.2mm, Pitch 1.27mm, IPC Medium Density"
  oval 2.2x0.6 smd: 1(-3.4,1.905) 2(-3.4,0.635) 3(-3.4,-0.635) 4(-3.4,-1.905) 5(3.4,-1.905) 6(3.4,-0.635) 7(3.4,0.635) 8(3.4,1.905)
  silkscreen extent -3.52,-2.75 1.9,2.88, body extent -2.73,-2.75 2.73,2.75, height 2.04
SOT23_N [mm] "SOT23, 3-Leads, Body 2.9x1.3mm, Pitch 0.95mm, Lead Span 2.3mm, IPC Medium Density"
  rect 1.3x0.6 smd: 1(-1.05,0.95) 2(-1.05,-0.95) 3(1.05,0)
  silkscreen extent -1.17,-1.5 0.7,1.92, body extent -0.7,-1.5 0.7,1.5, height 1.1
TB1065S [mm] "Подсветка диодная для индикатора TIC218"
  oval 2x4 hole 1.1 slot 3 at 90 deg: A(0.5,-16.5) K(0.5,-30.5)
  silkscreen extent 0,-47 68,0, body extent 0,-47 68,0, height 4.5
TIC218 [mm] "Индикатор ЖК 133x64  (77x56 мм)"
  round 1.5 hole 0.9: 1(43,-56) 2(41.2,-56) 3(39.4,-56) 4(37.6,-56) 5(35.8,-56) 6(34,-56) 7(3.5,0) 7(5.5,0) 7(71.5,0) 7(73.5,0)
  silkscreen extent 0,-56 77,0, body extent 0,-56.25 77,0.26, height 8
TQFP-PT64_N [mm] "Thin QFP, 64-Leads, Body 10x10mm, Pitch 0.5mm, IPC Medium Density"
  oval 1.8x0.3 smd: 1(-5.55,3.75) 2(-5.55,3.25) 3(-5.55,2.75) 4(-5.55,2.25) 5(-5.55,1.75) 6(-5.55,1.25) 7(-5.55,0.75) 8(-5.55,0.25) 9(-5.55,-0.25) 10(-5.55,-0.75) 11(-5.55,-1.25) 12(-5.55,-1.75) 13(-5.55,-2.25) 14(-5.55,-2.75) 15(-5.55,-3.25) 16(-5.55,-3.75) 33(5.55,-3.75) 34(5.55,-3.25) 35(5.55,-2.75) 36(5.55,-2.25) 37(5.55,-1.75) 38(5.55,-1.25) 39(5.55,-0.75) 40(5.55,-0.25) 41(5.55,0.25) 42(5.55,0.75) 43(5.55,1.25) 44(5.55,1.75) 45(5.55,2.25) 46(5.55,2.75) 47(5.55,3.25) 48(5.55,3.75)
  oval 0.3x1.8 smd: 17(-3.75,-5.55) 18(-3.25,-5.55) 19(-2.75,-5.55) 20(-2.25,-5.55) 21(-1.75,-5.55) 22(-1.25,-5.55) 23(-0.75,-5.55) 24(-0.25,-5.55) 25(0.25,-5.55) 26(0.75,-5.55) 27(1.25,-5.55) 28(1.75,-5.55) 29(2.25,-5.55) 30(2.75,-5.55) 31(3.25,-5.55) 32(3.75,-5.55) 49(3.75,5.55) 50(3.25,5.55) 51(2.75,5.55) 52(2.25,5.55) 53(1.75,5.55) 54(1.25,5.55) 55(0.75,5.55) 56(0.25,5.55) 57(-0.25,5.55) 58(-0.75,5.55) 59(-1.25,5.55) 60(-1.75,5.55) 61(-2.25,5.55) 62(-2.75,5.55) 63(-3.25,5.55) 64(-3.75,5.55)
  silkscreen extent -5.67,-4.25 4.25,4.57, body extent -5,-5 5,5, height 1.2
TQFP-PT100_N [mm] "Thin QFP, 100-Leads, Body 12x12mm, Pitch 0.4mm, IPC Medium Density"
  oval 1.8x0.24 smd: 1(-6.55,4.8) 2(-6.55,4.4) 3(-6.55,4) 4(-6.55,3.6) 5(-6.55,3.2) 6(-6.55,2.8) 7(-6.55,2.4) 8(-6.55,2) 9(-6.55,1.6) 10(-6.55,1.2) 11(-6.55,0.8) 12(-6.55,0.4) 13(-6.55,0) 14(-6.55,-0.4) 15(-6.55,-0.8) 16(-6.55,-1.2) 17(-6.55,-1.6) 18(-6.55,-2) 19(-6.55,-2.4) 20(-6.55,-2.8) 21(-6.55,-3.2) 22(-6.55,-3.6) 23(-6.55,-4) 24(-6.55,-4.4) 25(-6.55,-4.8) 51(6.55,-4.8) 52(6.55,-4.4) 53(6.55,-4) 54(6.55,-3.6) 55(6.55,-3.2) 56(6.55,-2.8) 57(6.55,-2.4) 58(6.55,-2) 59(6.55,-1.6) 60(6.55,-1.2) 61(6.55,-0.8) 62(6.55,-0.4) 63(6.55,0) 64(6.55,0.4) 65(6.55,0.8) 66(6.55,1.2) 67(6.55,1.6) 68(6.55,2) 69(6.55,2.4) 70(6.55,2.8) 71(6.55,3.2) 72(6.55,3.6) 73(6.55,4) 74(6.55,4.4) 75(6.55,4.8)
  oval 0.24x1.8 smd: 26(-4.8,-6.55) 27(-4.4,-6.55) 28(-4,-6.55) 29(-3.6,-6.55) 30(-3.2,-6.55) 31(-2.8,-6.55) 32(-2.4,-6.55) 33(-2,-6.55) 34(-1.6,-6.55) 35(-1.2,-6.55) 36(-0.8,-6.55) 37(-0.4,-6.55) 38(0,-6.55) 39(0.4,-6.55) 40(0.8,-6.55) 41(1.2,-6.55) 42(1.6,-6.55) 43(2,-6.55) 44(2.4,-6.55) 45(2.8,-6.55) 46(3.2,-6.55) 47(3.6,-6.55) 48(4,-6.55) 49(4.4,-6.55) 50(4.8,-6.55) 76(4.8,6.55) 77(4.4,6.55) 78(4,6.55) 79(3.6,6.55) 80(3.2,6.55) 81(2.8,6.55) 82(2.4,6.55) 83(2,6.55) 84(1.6,6.55) 85(1.2,6.55) 86(0.8,6.55) 87(0.4,6.55) 88(0,6.55) 89(-0.4,6.55) 90(-0.8,6.55) 91(-1.2,6.55) 92(-1.6,6.55) 93(-2,6.55) 94(-2.4,6.55) 95(-2.8,6.55) 96(-3.2,6.55) 97(-3.6,6.55) 98(-4,6.55) 99(-4.4,6.55) 100(-4.8,6.55)
  silkscreen extent -6.67,-5.25 5.25,5.6, body extent -6,-6 6,6, height 1.2
"Type D" [mm] "Tantal capacitor Type D"
  rect 3x2.5 smd: 1(0.5,0) 2(6.8,0)
  silkscreen extent -3,-2.1 8.5,2.2, body extent 0,-2.15 7.3,2.15, height 2.8
"Type E" [mm] "Tantal capacitor"
  rect 3x2.5 smd: 1(0.5,0) 2(6.8,0)
  silkscreen extent -3,-2.1 8.5,2.2, body extent 0,-2.15 7.3,2.15, height 4

## Part data
BT1 BT1_1: "Multicell Battery"
C1 C1_1 C2 C2_1 C2_2 C2_3 C3 C3_1 C3_2 C3_3 C4 C4_1 C4_2 C4_3 C5 C5_1 C5_2 C5_3 C5_4 C5_5 C5_6 C6 C6_1 C7 C7_1 C8 C8_1 C10 C10_1 C11 C11_1 C12 C12_1 C13 C13_1 C19 C19_1 C20 C20_1 C49 C49_1 C50 C50_1 C51 C51_1 C52 C52_1 C53 C53_1 C54 C54_1 C55 C55_1 C56 C56_1 C57 C57_1: "Capacitor"
C9 C9_1 C15 C15_1: "Polarized Capacitor (Radial)"
D1 D1_1 D4 D4_1 D7 D7_1: "Default Diode"
D2 D2_1: "Photosensitive Diode"
D2_2 D2_3 D3_3 D3_4: "Typical RED GaAs LED"
D3 D3_1 D3_2: "Подсветка диодная для индикатора TIC218"
D6 D6_1: "Schottky Rectifier"
P1 P1_1 P1_2: "Header, 7-Pin"
P1_3 P1_4 P1_5 P1_6: library part "Header 6", "Header, 6-Pin"
P2 P2_1: "Header, 5-Pin, Dual row, Right Angle"
P2_2 P2_3: library part "Header 4", "Header, 4-Pin"
P4 P4_1: library part "Header 3", "ON/off(1/0)"
P5 P5_1: library part "Header 7", "Header, 7-Pin"
P6 P6_1: "Header, 3-Pin, Right Angle"
Q1 Q1_1 Q1_2 Q1_3 Q2 Q2_1 Q2_2 Q2_3: "N-channel Enhancement Mode Vertical D-MOSFET"
R1 R1_1 R1_2 R1_3 R2 R2_1 R2_2 R2_3 R3 R3_1 R3_2 R3_3 R4 R4_1 R5 R5_1 R6 R6_1 R7 R7_1 R8 R8_1 R9 R9_1 R9_2 R9_3 R10 R10_1 R10_2 R10_3 R11 R11_1 R11_2 R11_3 R12 R12_1 R12_2 R12_3 R13 R13_1 R13_2 R13_3 R14 R14_1 R14_2 R14_3 R15 R15_1 R15_2 R15_3 R16 R16_1 R16_2 R16_3 R17 R17_1 R18 R18_1 R19 R19_1 R20 R20_1 R26 R26_1 R27 R27_1 R30 R30_1: "Resistor"
R4_2 R4_3 R5_2 R5_3 R6_2 R6_3 R7_2 R7_3 R8_2 R8_3 R17_2 R17_3 R18_2 R18_3 R19_2 R19_3 R20_2 R20_3 R21 R21_1 R22 R22_1 R23 R23_1 R24 R24_1 R25 R25_1: "Резисторная сборка"
U1 U1_1: "High Performance, 1-Mbit Flash Microcontroller with Ethernet, 64K Flash, 64-Pin TQFP, Industrial Temperature Range"
U1_2 U1_3: "High-Performance 16-bit Digital Signal Controller, 256 KB Flash, 30 KB RAM, 100-Pin TQFP, Industrial Temperature, Tape and Reel"
U2 U2_1: "SIMPLE SWITCHER; Power Converter High Efficiency 500mA Step-Down Voltage Regulator"
U2_2 U2_3: "Stand-Alone Ethernet Controller with SPI Interface, 28-Pin SOIC, Industrial Temperature"
U3 U3_1: "1 Mbit, 1MHz, 2.5V, I2C Serial EEPROM, 8-Pin SOIC 208mil, Industrial Temperature, Tape and Reel"
U3_2 U3_3: "Extremely Accurate SPI Bus RTC with  Integrated Crystal and SRAM"
Y1 Y1_1 Y1_2 Y1_3: library part XTAL

## Free pads (board coordinates)
  round 4.5 hole 3: 0(41,300) 0(49,237) 0(89,237) 0(97,300) 0(119,300) 0(127,237) 0(167,237) 0(175,300) 0(197,300) 0(205,237) 0(245,237) 0(253,300)
  round 5 hole 3.5: 0(47.9,160.2) 0(47.9,211.2) 0(54.9,221.2) 0(62.9,158.2) 0(102.9,158.2) 0(110.9,221.2) 0(117.9,160.2) 0(117.9,211.2) 0(151.8,160.2) 0(151.8,211.2) 0(158.8,221.2) 0(166.8,158.2) 0(206.8,158.2) 0(214.8,221.2) 0(221.8,160.2) 0(221.8,211.2)
  round 5 hole 3: 0(148.5,99.9) 0(148.5,144.9) 0(275.5,99.9) 0(275.5,144.9)

## Via types
v1: diameter 1.2, hole 0.6, Top Layer to Bottom Layer, 588 vias

## Nets (pads, with @x,y where several pads share a name; then routed paths per layer and width w, separated by ;. In a path a pad name is that pad's centre, name@x,y a point inside that pad or via, vN(x,y) a via of type N, cw(c..) or ccw(c..) an arc to the next point about the centre after c; other vN are vias at no path point)
pads on no net: BT1.1 BT1.2 BT1_1.1 BT1_1.2 C1.1 C1.2 C1_1.1 C1_1.2 C2.1 C2.2 C2_1.1 C2_1.2 C2_2.1 C2_2.2 C2_3.1 C2_3.2 C3.1 C3.2 C3_1.1 C3_1.2 C3_2.1 C3_2.2 C3_3.1 C3_3.2 C4.1 C4.2 C4_1.1 C4_1.2 C4_2.1 C4_2.2 C4_3.1 C4_3.2 C5.1 C5.2 C5_1.1 C5_1.2 C5_2.1 C5_2.2 C5_3.1 C5_3.2 C5_4.1 C5_4.2 C5_5.1 C5_5.2 C5_6.1 C5_6.2 C6.1 C6.2 C6_1.1 C6_1.2 C7.1 C7.2 C7_1.1 C7_1.2 C8.1 C8.2 C8_1.1 C8_1.2 C9.1 C9.2 C9_1.1 C9_1.2 C10.1 C10.2 C10_1.1 C10_1.2 C11.1 C11.2 C11_1.1 C11_1.2 C12.1 C12.2 C12_1.1 C12_1.2 C13.1 C13.2 C13_1.1 C13_1.2 C15.1 C15.2 C15_1.1 C15_1.2 C19.1 C19.2 C19_1.1 C19_1.2 C20.1 C20.2 C20_1.1 C20_1.2 C49.1 C49.2 C49_1.1 C49_1.2 C50.1 C50.2 C50_1.1 C50_1.2 C51.1 C51.2 C51_1.1 C51_1.2 C52.1 C52.2 C52_1.1 C52_1.2 C53.1 C53.2 C53_1.1 C53_1.2 C54.1 C54.2 C54_1.1 C54_1.2 C55.1 C55.2 C55_1.1 C55_1.2 C56.1 C56.2 C56_1.1 C56_1.2 C57.1 C57.2 C57_1.1 C57_1.2 D1.1 D1.2 D1_1.1 D1_1.2 D2.1 D2.2 D2_1.1 D2_1.2 D2_2.1 D2_2.2 D2_3.1 D2_3.2 D3.A D3.K D3_1.A D3_1.K D3_2.A D3_2.K D3_3.1 D3_3.2 D3_4.1 D3_4.2 D4.1 D4.2 D4_1.1 D4_1.2 D6.1 D6.2 D6_1.1 D6_1.2 D7.1 D7.2 D7_1.1 D7_1.2 L1.1 L1.2 L1_1.1 L1_1.2 L1_2.1 L1_2.2 L1_3.1 L1_3.2 L3.1 L3.2 L3_1.1 L3_1.2 LED1.1 LED1.2 LED1.3 LED1.4 LED1.5 LED1.6 LED1.7 LED1_1.1 LED1_1.2 LED1_1.3 LED1_1.4 LED1_1.5 LED1_1.6 LED1_1.7 LED1_2.1 LED1_2.2 LED1_2.3 LED1_2.4 LED1_2.5 LED1_2.6 LED1_2.7 P1.1 P1.2 P1.3 P1.4 P1.5 P1.6 P1.7 P1_1.1 P1_1.2 P1_1.3 P1_1.4 P1_1.5 P1_1.6 P1_1.7 P1_2.1 P1_2.2 P1_2.3 P1_2.4 P1_2.5 P1_2.6 P1_2.7 P1_3.1 P1_3.2 P1_3.3 P1_3.4 P1_3.5 P1_3.6 P1_4.1 P1_4.2 P1_4.3 P1_4.4 P1_4.5 P1_4.6 P1_5.1 P1_5.2 P1_5.3 P1_5.4 P1_5.5 P1_5.6 P1_6.1 P1_6.2 P1_6.3 P1_6.4 P1_6.5 P1_6.6 P2.1 P2.2 P2.3 P2.4 P2.5 P2.6 P2.7 P2.8 P2.9 P2.10 P2_1.1 P2_1.2 P2_1.3 P2_1.4 P2_1.5 P2_1.6 P2_1.7 P2_1.8 P2_1.9 P2_1.10 P2_2.1 P2_2.2 P2_2.3 P2_2.4 P2_3.1 P2_3.2 P2_3.3 P2_3.4 P3.1 P3.2 P3.3 P3.4 P3.4_1 P3.5 P3_1.1 P3_1.2 P3_1.3 P3_1.4 P3_1.4_1 P3_1.5 P3_2.1 P3_2.2 P3_2.3 P3_2.4 P3_2.5 P3_2.6 P3_2.7 P3_2.8 P3_2.9 P3_2.10 P3_2.11 P3_2.12 P3_2.13 P3_2.14 P3_2.15 P3_2.16 P3_2.17 P3_2.18 P3_2.19 P3_2.20 P3_2.21 P3_2.22 P3_2.23 P3_2.24 P3_2.25 P3_2.26 P3_2.27 P3_2.28 P3_2.29 P3_2.30 P3_2.31 P3_2.32 P3_2.33 P3_2.34 P3_2.35 P3_2.36 P3_2.37 P3_2.38 P3_2.39 P3_2.40 P3_2.41 P3_2.42 P3_2.43 P3_2.44 P3_2.45 P3_2.46 P3_2.47 P3_2.48 P3_2.49 P3_2.50 P3_2.51 P3_2.52 P3_2.53 P3_2.54 P3_2.55 P3_2.56 P3_2.57 P3_2.58 P3_2.59 P3_2.60 P3_2.61 P3_2.62 P3_3.1 P3_3.2 P3_3.3 P3_3.4 P3_3.5 P3_3.6 P3_3.7 P3_3.8 P3_3.9 P3_3.10 P3_3.11 P3_3.12 P3_3.13 P3_3.14 P3_3.15 P3_3.16 P3_3.17 P3_3.18 P3_3.19 P3_3.20 P3_3.21 P3_3.22 P3_3.23 P3_3.24 P3_3.25 P3_3.26 P3_3.27 P3_3.28 P3_3.29 P3_3.30 P3_3.31 P3_3.32 P3_3.33 P3_3.34 P3_3.35 P3_3.36 P3_3.37 P3_3.38 P3_3.39 P3_3.40 P3_3.41 P3_3.42 P3_3.43 P3_3.44 P3_3.45 P3_3.46 P3_3.47 P3_3.48 P3_3.49 P3_3.50 P3_3.51 P3_3.52 P3_3.53 P3_3.54 P3_3.55 P3_3.56 P3_3.57 P3_3.58 P3_3.59 P3_3.60 P3_3.61 P3_3.62 P4.1 P4.2 P4.3 P4_1.1 P4_1.2 P4_1.3 P5.1 P5.2 P5.3 P5.4 P5.5 P5.6 P5.7 P5_1.1 P5_1.2 P5_1.3 P5_1.4 P5_1.5 P5_1.6 P5_1.7 P6.1 P6.2 P6.3 P6_1.1 P6_1.2 P6_1.3 P10.1 P10.2 P10.3 P10.4 P10.5 P10.6 P10.7 P10.8 P10.9 P10.10 P10.11 P10.12 P10.13 P10.14 P10.15 P10.16 P10_1.1 P10_1.2 P10_1.3 P10_1.4 P10_1.5 P10_1.6 P10_1.7 P10_1.8 P10_1.9 P10_1.10 P10_1.11 P10_1.12 P10_1.13 P10_1.14 P10_1.15 P10_1.16 P*.1 P*.2 P*.3 P*.4 P*.5 P*.6 P*.7 P*.8 P*.9 P*.10 P*.11 P*.12 P*.13 P*.14 P*.15 P*.16 P*_1.1 P*_1.2 P*_1.3 P*_1.4 P*_1.5 P*_1.6 P*_1.7 P*_1.8 P*_1.9 P*_1.10 P*_1.11 P*_1.12 P*_1.13 P*_1.14 P*_1.15 P*_1.16 Q1.1 Q1.2 Q1.3 Q1_1.1 Q1_1.2 Q1_1.3 Q1_2.1 Q1_2.2 Q1_2.3 Q1_3.1 Q1_3.2 Q1_3.3 Q2.1 Q2.2 Q2.3 Q2_1.1 Q2_1.2 Q2_1.3 Q2_2.1 Q2_2.2 Q2_2.3 Q2_3.1 Q2_3.2 Q2_3.3 R1.1 R1.2 R1_1.1 R1_1.2 R1_2.1 R1_2.2 R1_3.1 R1_3.2 R2.1 R2.2 R2_1.1 R2_1.2 R2_2.1 R2_2.2 R2_3.1 R2_3.2 R3.1 R3.2 R3_1.1 R3_1.2 R3_2.1 R3_2.2 R3_3.1 R3_3.2 R4.1 R4.2 R4_1.1 R4_1.2 R4_2.1 R4_2.2 R4_2.3 R4_2.4 R4_2.5 R4_2.6 R4_2.7 R4_2.8 R4_3.1 R4_3.2 R4_3.3 R4_3.4 R4_3.5 R4_3.6 R4_3.7 R4_3.8 R5.1 R5.2 R5_1.1 R5_1.2 R5_2.1 R5_2.2 R5_2.3 R5_2.4 R5_2.5 R5_2.6 R5_2.7 R5_2.8 R5_3.1 R5_3.2 R5_3.3 R5_3.4 R5_3.5 R5_3.6 R5_3.7 R5_3.8 R6.1 R6.2 R6_1.1 R6_1.2 R6_2.1 R6_2.2 R6_2.3 R6_2.4 R6_2.5 R6_2.6 R6_2.7 R6_2.8 R6_3.1 R6_3.2 R6_3.3 R6_3.4 R6_3.5 R6_3.6 R6_3.7 R6_3.8 R7.1 R7.2 R7_1.1 R7_1.2 R7_2.1 R7_2.2 R7_2.3 R7_2.4 R7_2.5 R7_2.6 R7_2.7 R7_2.8 R7_3.1 R7_3.2 R7_3.3 R7_3.4 R7_3.5 R7_3.6 R7_3.7 R7_3.8 R8.1 R8.2 R8_1.1 R8_1.2 R8_2.1 R8_2.2 R8_2.3 R8_2.4 R8_2.5 R8_2.6 R8_2.7 R8_2.8 R8_3.1 R8_3.2 R8_3.3 R8_3.4 R8_3.5 R8_3.6 R8_3.7 R8_3.8 R9.1 R9.2 R9_1.1 R9_1.2 R9_2.1 R9_2.2 R9_3.1 R9_3.2 R10.1 R10.2 R10_1.1 R10_1.2 R10_2.1 R10_2.2 R10_3.1 R10_3.2 R11.1 R11.2 R11_1.1 R11_1.2 R11_2.1 R11_2.2 R11_3.1 R11_3.2 R12.1 R12.2 R12_1.1 R12_1.2 R12_2.1 R12_2.2 R12_3.1 R12_3.2 R13.1 R13.2 R13_1.1 R13_1.2 R13_2.1 R13_2.2 R13_3.1 R13_3.2 R14.1 R14.2 R14_1.1 R14_1.2 R14_2.1 R14_2.2 R14_3.1 R14_3.2 R15.1 R15.2 R15_1.1 R15_1.2 R15_2.1 R15_2.2 R15_3.1 R15_3.2 R16.1 R16.2 R16_1.1 R16_1.2 R16_2.1 R16_2.2 R16_3.1 R16_3.2 R17.1 R17.2 R17_1.1 R17_1.2 R17_2.1 R17_2.2 R17_2.3 R17_2.4 R17_2.5 R17_2.6 R17_2.7 R17_2.8 R17_3.1 R17_3.2 R17_3.3 R17_3.4 R17_3.5 R17_3.6 R17_3.7 R17_3.8 R18.1 R18.2 R18_1.1 R18_1.2 R18_2.1 R18_2.2 R18_2.3 R18_2.4 R18_2.5 R18_2.6 R18_2.7 R18_2.8 R18_3.1 R18_3.2 R18_3.3 R18_3.4 R18_3.5 R18_3.6 R18_3.7 R18_3.8 R19.1 R19.2 R19_1.1 R19_1.2 R19_2.1 R19_2.2 R19_2.3 R19_2.4 R19_2.5 R19_2.6 R19_2.7 R19_2.8 R19_3.1 R19_3.2 R19_3.3 R19_3.4 R19_3.5 R19_3.6 R19_3.7 R19_3.8 R20.1 R20.2 R20_1.1 R20_1.2 R20_2.1 R20_2.2 R20_2.3 R20_2.4 R20_2.5 R20_2.6 R20_2.7 R20_2.8 R20_3.1 R20_3.2 R20_3.3 R20_3.4 R20_3.5 R20_3.6 R20_3.7 R20_3.8 R21.1 R21.2 R21.3 R21.4 R21.5 R21.6 R21.7 R21.8 R21_1.1 R21_1.2 R21_1.3 R21_1.4 R21_1.5 R21_1.6 R21_1.7 R21_1.8 R22.1 R22.2 R22.3 R22.4 R22.5 R22.6 R22.7 R22.8 R22_1.1 R22_1.2 R22_1.3 R22_1.4 R22_1.5 R22_1.6 R22_1.7 R22_1.8 R23.1 R23.2 R23.3 R23.4 R23.5 R23.6 R23.7 R23.8 R23_1.1 R23_1.2 R23_1.3 R23_1.4 R23_1.5 R23_1.6 R23_1.7 R23_1.8 R24.1 R24.2 R24.3 R24.4 R24.5 R24.6 R24.7 R24.8 R24_1.1 R24_1.2 R24_1.3 R24_1.4 R24_1.5 R24_1.6 R24_1.7 R24_1.8 R25.1 R25.2 R25.3 R25.4 R25.5 R25.6 R25.7 R25.8 R25_1.1 R25_1.2 R25_1.3 R25_1.4 R25_1.5 R25_1.6 R25_1.7 R25_1.8 R26.1 R26.2 R26_1.1 R26_1.2 R27.1 R27.2 R27_1.1 R27_1.2 R30.1 R30.2 R30_1.1 R30_1.2 U1.1 U1.2 U1.3 U1.4 U1.5 U1.6 U1.7 U1.8 U1.9 U1.10 U1.11 U1.12 U1.13 U1.14 U1.15 U1.16 U1.17 U1.18 U1.19 U1.20 U1.21 U1.22 U1.23 U1.24 U1.25 U1.26 U1.27 U1.28 U1.29 U1.30 U1.31 U1.32 U1.33 U1.34 U1.35 U1.36 U1.37 U1.38 U1.39 U1.40 U1.41 U1.42 U1.43 U1.44 U1.45 U1.46 U1.47 U1.48 U1.49 U1.50 U1.51 U1.52 U1.53 U1.54 U1.55 U1.56 U1.57 U1.58 U1.59 U1.60 U1.61 U1.62 U1.63 U1.64 U1_1.1 U1_1.2 U1_1.3 U1_1.4 U1_1.5 U1_1.6 U1_1.7 U1_1.8 U1_1.9 U1_1.10 U1_1.11 U1_1.12 U1_1.13 U1_1.14 U1_1.15 U1_1.16 U1_1.17 U1_1.18 U1_1.19 U1_1.20 U1_1.21 U1_1.22 U1_1.23 U1_1.24 U1_1.25 U1_1.26 U1_1.27 U1_1.28 U1_1.29 U1_1.30 U1_1.31 U1_1.32 U1_1.33 U1_1.34 U1_1.35 U1_1.36 U1_1.37 U1_1.38 U1_1.39 U1_1.40 U1_1.41 U1_1.42 U1_1.43 U1_1.44 U1_1.45 U1_1.46 U1_1.47 U1_1.48 U1_1.49 U1_1.50 U1_1.51 U1_1.52 U1_1.53 U1_1.54 U1_1.55 U1_1.56 U1_1.57 U1_1.58 U1_1.59 U1_1.60 U1_1.61 U1_1.62 U1_1.63 U1_1.64 U1_2.1 U1_2.2 U1_2.3 U1_2.4 U1_2.5 U1_2.6 U1_2.7 U1_2.8 U1_2.9 U1_2.10 U1_2.11 U1_2.12 U1_2.13 U1_2.14 U1_2.15 U1_2.16 U1_2.17 U1_2.18 U1_2.19 U1_2.20 U1_2.21 U1_2.22 U1_2.23 U1_2.24 U1_2.25 U1_2.26 U1_2.27 U1_2.28 U1_2.29 U1_2.30 U1_2.31 U1_2.32 U1_2.33 U1_2.34 U1_2.35 U1_2.36 U1_2.37 U1_2.38 U1_2.39 U1_2.40 U1_2.41 U1_2.42 U1_2.43 U1_2.44 U1_2.45 U1_2.46 U1_2.47 U1_2.48 U1_2.49 U1_2.50 U1_2.51 U1_2.52 U1_2.53 U1_2.54 U1_2.55 U1_2.56 U1_2.57 U1_2.58 U1_2.59 U1_2.60 U1_2.61 U1_2.62 U1_2.63 U1_2.64 U1_2.65 U1_2.66 U1_2.67 U1_2.68 U1_2.69 U1_2.70 U1_2.71 U1_2.72 U1_2.73 U1_2.74 U1_2.75 U1_2.76 U1_2.77 U1_2.78 U1_2.79 U1_2.80 U1_2.81 U1_2.82 U1_2.83 U1_2.84 U1_2.85 U1_2.86 U1_2.87 U1_2.88 U1_2.89 U1_2.90 U1_2.91 U1_2.92 U1_2.93 U1_2.94 U1_2.95 U1_2.96 U1_2.97 U1_2.98 U1_2.99 U1_2.100 U1_3.1 U1_3.2 U1_3.3 U1_3.4 U1_3.5 U1_3.6 U1_3.7 U1_3.8 U1_3.9 U1_3.10 U1_3.11 U1_3.12 U1_3.13 U1_3.14 U1_3.15 U1_3.16 U1_3.17 U1_3.18 U1_3.19 U1_3.20 U1_3.21 U1_3.22 U1_3.23 U1_3.24 U1_3.25 U1_3.26 U1_3.27 U1_3.28 U1_3.29 U1_3.30 U1_3.31 U1_3.32 U1_3.33 U1_3.34 U1_3.35 U1_3.36 U1_3.37 U1_3.38 U1_3.39 U1_3.40 U1_3.41 U1_3.42 U1_3.43 U1_3.44 U1_3.45 U1_3.46 U1_3.47 U1_3.48 U1_3.49 U1_3.50 U1_3.51 U1_3.52 U1_3.53 U1_3.54 U1_3.55 U1_3.56 U1_3.57 U1_3.58 U1_3.59 U1_3.60 U1_3.61 U1_3.62 U1_3.63 U1_3.64 U1_3.65 U1_3.66 U1_3.67 U1_3.68 U1_3.69 U1_3.70 U1_3.71 U1_3.72 U1_3.73 U1_3.74 U1_3.75 U1_3.76 U1_3.77 U1_3.78 U1_3.79 U1_3.80 U1_3.81 U1_3.82 U1_3.83 U1_3.84 U1_3.85 U1_3.86 U1_3.87 U1_3.88 U1_3.89 U1_3.90 U1_3.91 U1_3.92 U1_3.93 U1_3.94 U1_3.95 U1_3.96 U1_3.97 U1_3.98 U1_3.99 U1_3.100 U2.1 U2.2 U2.3 U2.4 U2.5 U2.6 U2.7 U2.8 U2_1.1 U2_1.2 U2_1.3 U2_1.4 U2_1.5 U2_1.6 U2_1.7 U2_1.8 U2_2.1 U2_2.2 U2_2.3 U2_2.4 U2_2.5 U2_2.6 U2_2.7 U2_2.8 U2_2.9 U2_2.10 U2_2.11 U2_2.12 U2_2.13 U2_2.14 U2_2.15 U2_2.16 U2_2.17 U2_2.18 U2_2.19 U2_2.20 U2_2.21 U2_2.22 U2_2.23 U2_2.24 U2_2.25 U2_2.26 U2_2.27 U2_2.28 U2_3.1 U2_3.2 U2_3.3 U2_3.4 U2_3.5 U2_3.6 U2_3.7 U2_3.8 U2_3.9 U2_3.10 U2_3.11 U2_3.12 U2_3.13 U2_3.14 U2_3.15 U2_3.16 U2_3.17 U2_3.18 U2_3.19 U2_3.20 U2_3.21 U2_3.22 U2_3.23 U2_3.24 U2_3.25 U2_3.26 U2_3.27 U2_3.28 U3.1 U3.2 U3.3 U3.4 U3.5 U3.6 U3.7 U3.8 U3_1.1 U3_1.2 U3_1.3 U3_1.4 U3_1.5 U3_1.6 U3_1.7 U3_1.8 U3_2.1 U3_2.2 U3_2.3 U3_2.4 U3_2.5 U3_2.6 U3_2.7 U3_2.8 U3_2.9 U3_2.10 U3_2.11 U3_2.12 U3_2.13 U3_2.14 U3_2.15 U3_2.16 U3_2.17 U3_2.18 U3_2.19 U3_2.20 U3_3.1 U3_3.2 U3_3.3 U3_3.4 U3_3.5 U3_3.6 U3_3.7 U3_3.8 U3_3.9 U3_3.10 U3_3.11 U3_3.12 U3_3.13 U3_3.14 U3_3.15 U3_3.16 U3_3.17 U3_3.18 U3_3.19 U3_3.20 U4.1 U4.2 U4.3 U4.4 U4.5 U4.6 U4.7 U4.8 U4.9 U4.10 U4.11 U4.12 U4.13 U4.14 U4.15 U4.16 U4_1.1 U4_1.2 U4_1.3 U4_1.4 U4_1.5 U4_1.6 U4_1.7 U4_1.8 U4_1.9 U4_1.10 U4_1.11 U4_1.12 U4_1.13 U4_1.14 U4_1.15 U4_1.16 Y1.1 Y1.2 Y1.3 Y1.4 Y1_1.1 Y1_1.2 Y1_1.3 Y1_1.4 Y1_2.1 Y1_2.2 Y1_2.3 Y1_2.4 Y1_3.1 Y1_3.2 Y1_3.3 Y1_3.4